# EAGLE board Main Boardokd (EAGLE 7.1.0)
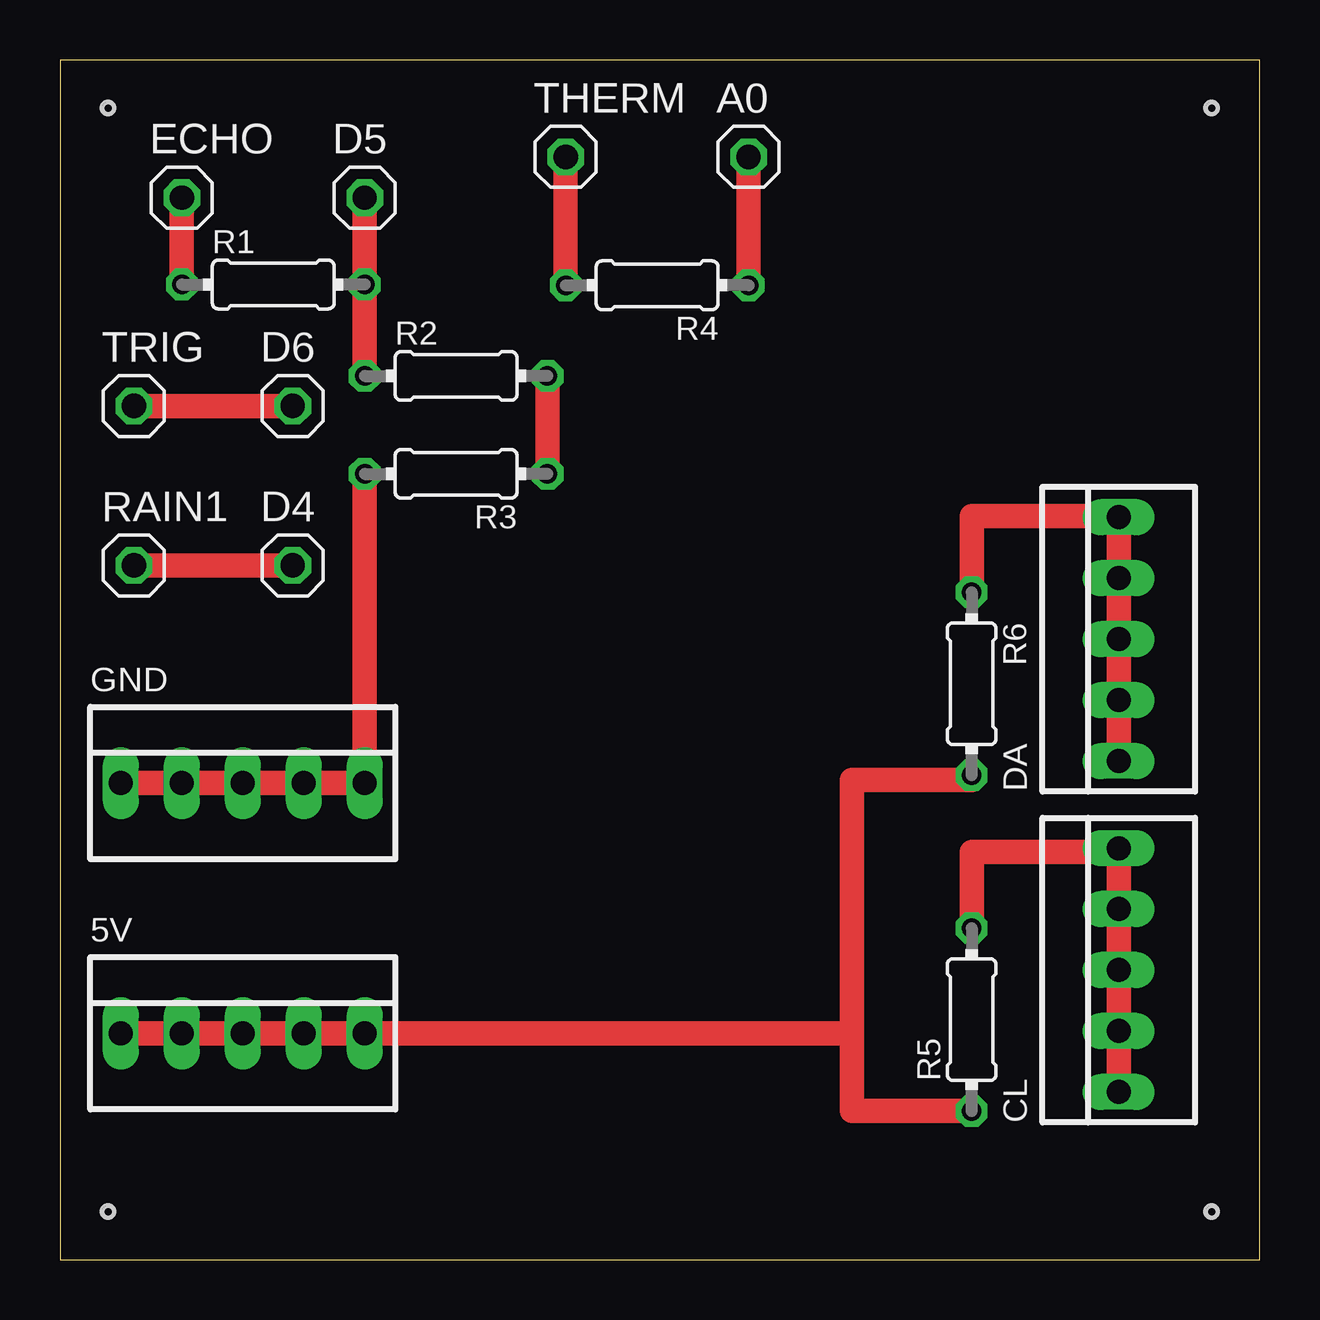
[diagram p0: board, top side]

Size 50 x 50 mm. Coordinates in mm from the lower left corner, seen from the top.
Outline: 0,0 50,0 50,50 0,50 0,0
Copper layers (1*16): Top 0.035mm / dielectric 1.5mm / Bottom 0.035mm
Design rules "default": minimum track width 10mil, minimum drill 24mil, track to track 8mil, track to pad 8mil, pad to pad 8mil, via to via 8mil, smd to smd 8mil, copper to edge 40mil, drill to drill 8mil, minimum pad ring 10mil, minimum via ring 8mil, stop-mask expansion 4mil, vias tented up to drill 0mil, thermal gap 10mil
Holes 0.6 mm at 48,2 2,2 2,48 48,48
Holes 0.4 mm at 2,2 48,2 48,48 2,48

## Footprints (pad centres in the part's own frame; a part is rotated, then mirrored left to right if it is on the bottom)
22-23-2051 = drill 1 long: 1 -5.08,0; 2 -2.54,0; 3 0,0; 4 2.54,0; 5 5.08,0
1X01 = drill 1.016 octagon: 1 0,0
0204/7 = drill 0.813 octagon: 1 -3.81,0; 2 3.81,0

## Placement (x,y rotation side)
5V  +5V  [22-23-2051]  7.62,9.43 0 top
A0  [1X01]  28.7,45.96 0 top
CL  SCL  [22-23-2051]  44.13,12.06 90 top
D4  [1X01]  9.7,28.93 0 top
D5  [1X01]  12.7,44.26 0 top
D6  [1X01]  9.7,35.58 0 top
DA  SDA  [22-23-2051]  44.13,25.86 90 top
ECHO  [1X01]  5.08,44.26 0 top
GND  GND  [22-23-2051]  7.62,19.86 0 top
R1  1K  [0204/7]  8.89,40.64 0 top
R2  1K  [0204/7]  16.51,36.83 0 top
R3  1K  [0204/7]  16.51,32.75 180 top
R4  10K  [0204/7]  24.89,40.61 180 top
R5  1K  [0204/7]  38,10 90 top
R6  1K  [0204/7]  38,24 270 top
RAIN1  [1X01]  3.08,28.93 0 top
THERM  [1X01]  21.08,45.96 0 top
TRIG  [1X01]  3.08,35.58 0 top

## Library data of the parts
5V CL DA GND = con-molex; MF: MOLEX; MPN: 22-23-2051; OC_FARNELL: 1462952; OC_NEWARK: 38C9178
A0 D4-D6 ECHO RAIN1 THERM TRIG = pinhead
R1-R6 = resistor

## Nets
+3V3: GND.1 GND.2 GND.3 GND.4 GND.5 R3.2
+5V/2: DA.1 DA.2 DA.3 DA.4 DA.5 R6.1
ECHO: ECHO.1 R1.1
GND1: R2.2 R3.1
GND3: CL.1 CL.2 CL.3 CL.4 CL.5 R5.2
GPIO24: D5.1 R1.2 R2.1
N$1: D6.1 TRIG.1
N$2: A0.1 R4.1
N$3: R4.2 THERM.1
N$4: D4.1 RAIN1.1
VCC: 5V.1 5V.2 5V.3 5V.4 5V.5 R5.1 R6.2

## Tracks (layer width: path | path; a pad name or v marks a point on that pad's centre or on a via)
+3V3
  Top 1.016: R3.2 GND.5 GND.4 GND.3 GND.2 GND.1
+5V/2
  Top 1.016: DA.1 DA.2 DA.3 DA.4 DA.5 44.13,31 38,31 R6.1
ECHO
  Top 1.016: ECHO.1 R1.1
GND1
  Top 1.016: R2.2 R3.1
GND3
  Top 1.016: CL.1 CL.2 CL.3 CL.4 CL.5 44.13,17 38,17 R5.2
GPIO24
  Top 1.016: D5.1 R1.2 R2.1
N$1
  Top 1.016: TRIG.1 D6.1
N$2
  Top 1.016: A0.1 R4.1
N$3
  Top 1.016: THERM.1 R4.2
N$4
  Top 1.016: RAIN1.1 D4.1
VCC
  Top 1.016: 5V.1 5V.2 5V.3 5V.4 5V.5 33,9.43 | 33,9.43 33,20 38,20 R6.2 | R5.1 33,6.19 33,9.43